# EAGLE board SparkFun_ESP32_Environment_Sensor_Shield_Panel_v10 (EAGLE 7.5.0), part 1 of 4
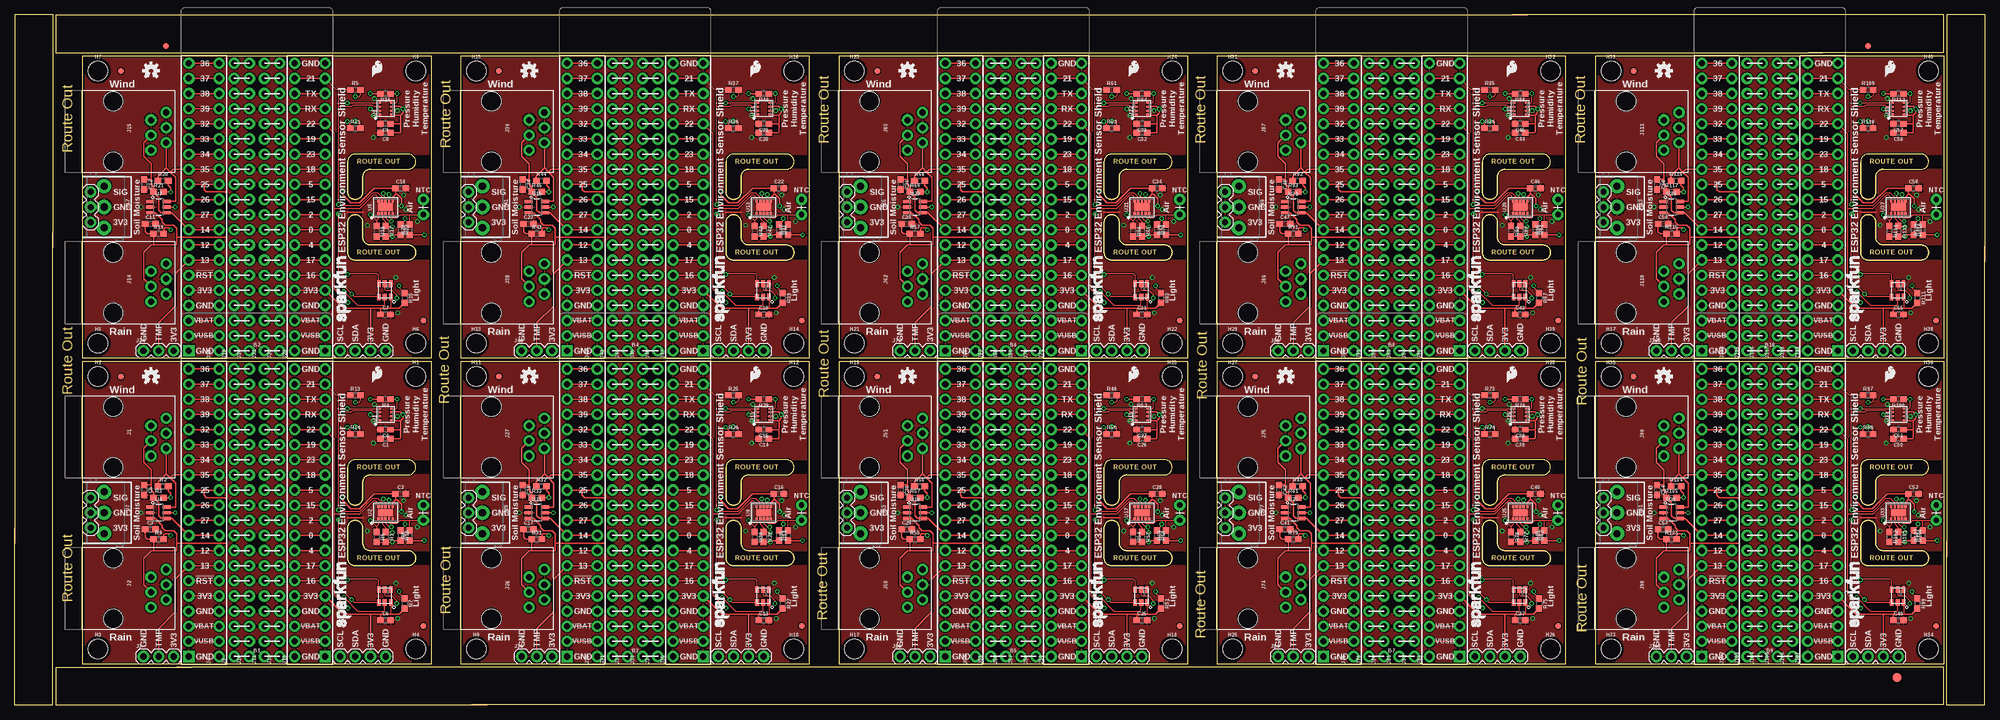
[diagram p0: board, top side]
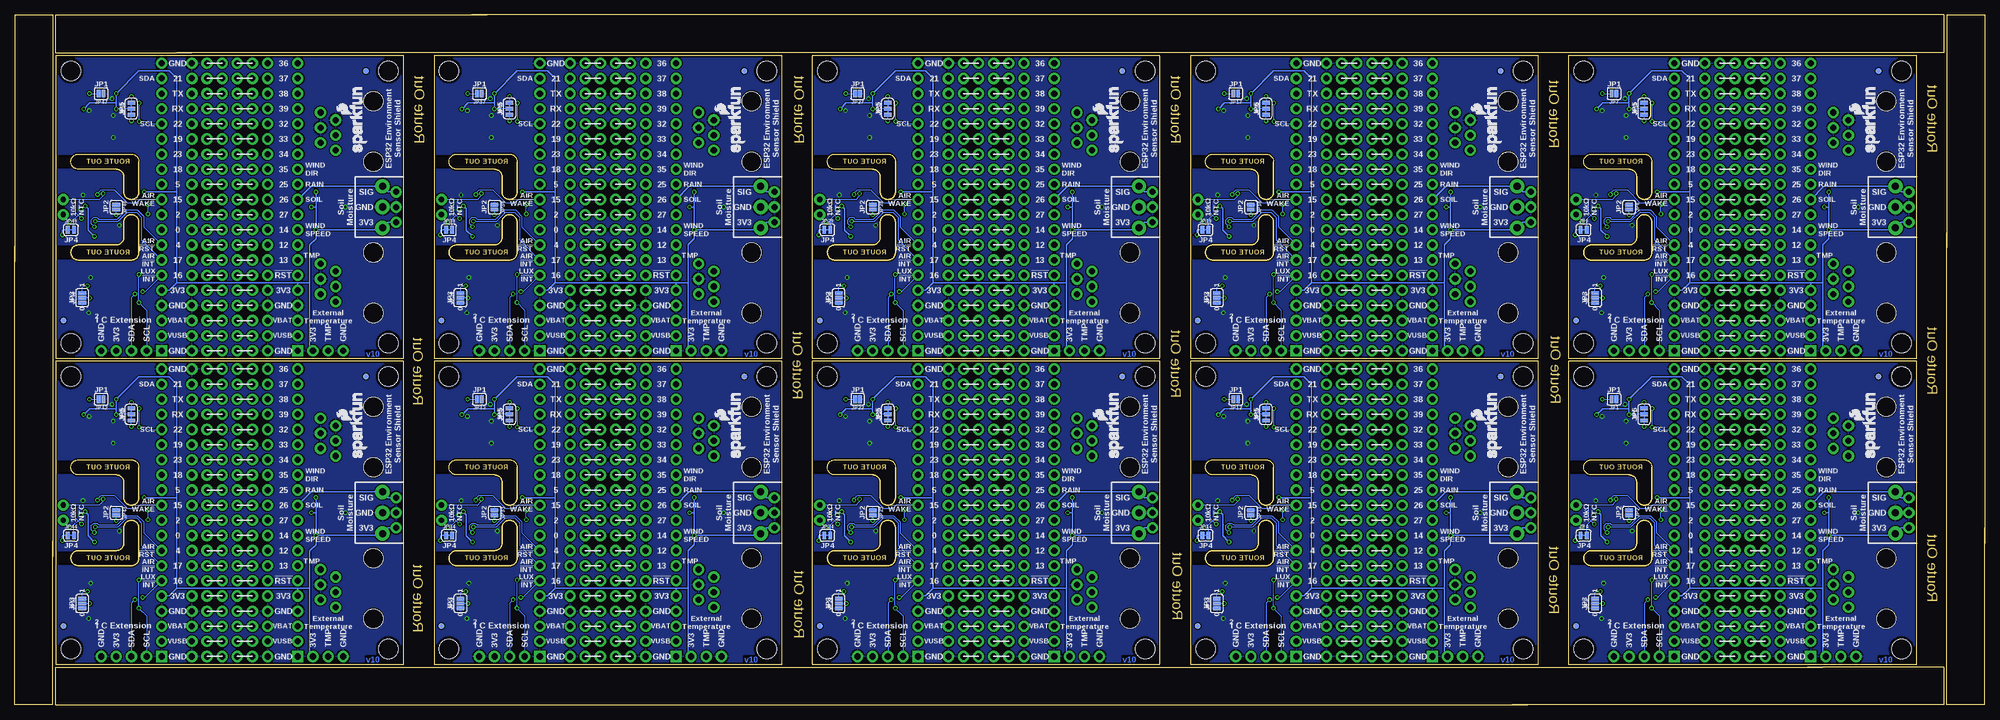
[diagram p1: board, bottom side, seen from below]

Size 330.71 x 115.82 mm. Coordinates in mm from the lower left corner, seen from the top.
Outline: 6.35,79.25 6.35,0 0,0 0,29.72
Outline: 0,27.18 0,115.82 6.35,115.82 6.35,76.71
Outline: 79.25,0 6.86,0 6.86,6.35 29.72,6.35
Outline: 27.18,6.35 323.85,6.35 323.85,0 76.71,0
Outline: 330.71,76.96 330.71,0 324.36,0 324.36,27.43
Outline: 324.36,24.89 324.36,115.82 330.71,115.82 330.71,74.42
Outline: 251.46,115.82 323.85,115.82 323.85,109.47 300.99,109.47
Outline: 303.53,109.47 6.86,109.47 6.86,115.82 254,115.82
Outline: 11.43,6.86 11.43,57.66 69.85,57.66 69.85,6.86 11.43,6.86
Outline: 57.15,41.15 arc90 55.88,39.88 55.88,34.8 arc90 57.15,33.53 arc90 58.42,34.8 58.42,37.34 arc-90 59.69,38.61 66.04,38.61 arc90 67.31,39.88 arc90 66.04,41.15 57.15,41.15
Outline: 55.88,24.64 arc90 57.15,23.37 66.04,23.37 arc90 67.31,24.64 arc90 66.04,25.91 59.69,25.91 arc-90 58.42,27.18 58.42,29.72 arc90 57.15,30.99 arc90 55.88,29.72 55.88,24.64
Outline: 11.43,58.17 11.43,108.97 69.85,108.97 69.85,58.17 11.43,58.17
Outline: 57.15,92.46 arc90 55.88,91.19 55.88,86.11 arc90 57.15,84.84 arc90 58.42,86.11 58.42,88.65 arc-90 59.69,89.92 66.04,89.92 arc90 67.31,91.19 arc90 66.04,92.46 57.15,92.46
Outline: 55.88,75.95 arc90 57.15,74.68 66.04,74.68 arc90 67.31,75.95 arc90 66.04,77.22 59.69,77.22 arc-90 58.42,78.49 58.42,81.03 arc90 57.15,82.3 arc90 55.88,81.03 55.88,75.95
Outline: 74.93,6.86 74.93,57.66 133.35,57.66 133.35,6.86 74.93,6.86
Outline: 120.65,41.15 arc90 119.38,39.88 119.38,34.8 arc90 120.65,33.53 arc90 121.92,34.8 121.92,37.34 arc-90 123.19,38.61 129.54,38.61 arc90 130.81,39.88 arc90 129.54,41.15 120.65,41.15
Outline: 119.38,24.64 arc90 120.65,23.37 129.54,23.37 arc90 130.81,24.64 arc90 129.54,25.91 123.19,25.91 arc-90 121.92,27.18 121.92,29.72 arc90 120.65,30.99 arc90 119.38,29.72 119.38,24.64
Outline: 74.93,58.17 74.93,108.97 133.35,108.97 133.35,58.17 74.93,58.17
Outline: 120.65,92.46 arc90 119.38,91.19 119.38,86.11 arc90 120.65,84.84 arc90 121.92,86.11 121.92,88.65 arc-90 123.19,89.92 129.54,89.92 arc90 130.81,91.19 arc90 129.54,92.46 120.65,92.46
Outline: 119.38,75.95 arc90 120.65,74.68 129.54,74.68 arc90 130.81,75.95 arc90 129.54,77.22 123.19,77.22 arc-90 121.92,78.49 121.92,81.03 arc90 120.65,82.3 arc90 119.38,81.03 119.38,75.95
Outline: 138.43,6.86 138.43,57.66 196.85,57.66 196.85,6.86 138.43,6.86
Outline: 184.15,41.15 arc90 182.88,39.88 182.88,34.8 arc90 184.15,33.53 arc90 185.42,34.8 185.42,37.34 arc-90 186.69,38.61 193.04,38.61 arc90 194.31,39.88 arc90 193.04,41.15 184.15,41.15
Outline: 182.88,24.64 arc90 184.15,23.37 193.04,23.37 arc90 194.31,24.64 arc90 193.04,25.91 186.69,25.91 arc-90 185.42,27.18 185.42,29.72 arc90 184.15,30.99 arc90 182.88,29.72 182.88,24.64
Outline: 138.43,58.17 138.43,108.97 196.85,108.97 196.85,58.17 138.43,58.17
Outline: 184.15,92.46 arc90 182.88,91.19 182.88,86.11 arc90 184.15,84.84 arc90 185.42,86.11 185.42,88.65 arc-90 186.69,89.92 193.04,89.92 arc90 194.31,91.19 arc90 193.04,92.46 184.15,92.46
Outline: 182.88,75.95 arc90 184.15,74.68 193.04,74.68 arc90 194.31,75.95 arc90 193.04,77.22 186.69,77.22 arc-90 185.42,78.49 185.42,81.03 arc90 184.15,82.3 arc90 182.88,81.03 182.88,75.95
Outline: 201.93,6.86 201.93,57.66 260.35,57.66 260.35,6.86 201.93,6.86
Outline: 247.65,41.15 arc90 246.38,39.88 246.38,34.8 arc90 247.65,33.53 arc90 248.92,34.8 248.92,37.34 arc-90 250.19,38.61 256.54,38.61 arc90 257.81,39.88 arc90 256.54,41.15 247.65,41.15
Outline: 246.38,24.64 arc90 247.65,23.37 256.54,23.37 arc90 257.81,24.64 arc90 256.54,25.91 250.19,25.91 arc-90 248.92,27.18 248.92,29.72 arc90 247.65,30.99 arc90 246.38,29.72 246.38,24.64
Outline: 201.93,58.17 201.93,108.97 260.35,108.97 260.35,58.17 201.93,58.17
Outline: 247.65,92.46 arc90 246.38,91.19 246.38,86.11 arc90 247.65,84.84 arc90 248.92,86.11 248.92,88.65 arc-90 250.19,89.92 256.54,89.92 arc90 257.81,91.19 arc90 256.54,92.46 247.65,92.46
Outline: 246.38,75.95 arc90 247.65,74.68 256.54,74.68 arc90 257.81,75.95 arc90 256.54,77.22 250.19,77.22 arc-90 248.92,78.49 248.92,81.03 arc90 247.65,82.3 arc90 246.38,81.03 246.38,75.95
Outline: 265.43,6.86 265.43,57.66 323.85,57.66 323.85,6.86 265.43,6.86
Outline: 311.15,41.15 arc90 309.88,39.88 309.88,34.8 arc90 311.15,33.53 arc90 312.42,34.8 312.42,37.34 arc-90 313.69,38.61 320.04,38.61 arc90 321.31,39.88 arc90 320.04,41.15 311.15,41.15
Outline: 309.88,24.64 arc90 311.15,23.37 320.04,23.37 arc90 321.31,24.64 arc90 320.04,25.91 313.69,25.91 arc-90 312.42,27.18 312.42,29.72 arc90 311.15,30.99 arc90 309.88,29.72 309.88,24.64
Outline: 265.43,58.17 265.43,108.97 323.85,108.97 323.85,58.17 265.43,58.17
Outline: 311.15,92.46 arc90 309.88,91.19 309.88,86.11 arc90 311.15,84.84 arc90 312.42,86.11 312.42,88.65 arc-90 313.69,89.92 320.04,89.92 arc90 321.31,91.19 arc90 320.04,92.46 311.15,92.46
Outline: 309.88,75.95 arc90 311.15,74.68 320.04,74.68 arc90 321.31,75.95 arc90 320.04,77.22 313.69,77.22 arc-90 312.42,78.49 312.42,81.03 arc90 311.15,82.3 arc90 309.88,81.03 309.88,75.95
Copper layers (1*16): Top 0.035mm / dielectric 1.5mm / Bottom 0.035mm
Design rules "SparkFun-2-layer-TIGHT": minimum track width 7mil, minimum drill 15mil, track to track 7mil, track to pad 7mil, pad to pad 7mil, via to via 7mil, smd to smd 7mil, copper to edge 7mil, drill to drill 7mil, minimum pad ring 7mil, minimum via ring 7mil, stop-mask expansion 4mil, vias tented up to drill 25mil, thermal gap 10mil
Milling: area 55.9,33.5 to 67.3,41.1; area 55.9,23.4 to 67.3,31; area 55.9,84.8 to 67.3,92.5; area 55.9,74.7 to 67.3,82.3; area 119.4,33.5 to 130.8,41.1; area 119.4,23.4 to 130.8,31; area 119.4,84.8 to 130.8,92.5; area 119.4,74.7 to 130.8,82.3; area 182.9,33.5 to 194.3,41.1; area 182.9,23.4 to 194.3,31; area 182.9,84.8 to 194.3,92.5; area 182.9,74.7 to 194.3,82.3; area 246.4,33.5 to 257.8,41.1; area 246.4,23.4 to 257.8,31; area 246.4,84.8 to 257.8,92.5; area 246.4,74.7 to 257.8,82.3; area 309.9,33.5 to 321.3,41.1; area 309.9,23.4 to 321.3,31; area 309.9,84.8 to 321.3,92.5; area 309.9,74.7 to 321.3,82.3

## Footprints (pad centres in the part's own frame; a part is rotated, then mirrored left to right if it is on the bottom)
ESP32_THING_NO_ANT = drill 1.016 pad 1.88 square: 1 1.27,1.27; 40 24.13,1.27 | drill 1.016 pad 1.88: 2 1.27,3.81; 3 1.27,6.35; 4 1.27,8.89; 5 1.27,11.43; 6 1.27,13.97; 7 1.27,16.51; 8 1.27,19.05; 9 1.27,21.59; 10 1.27,24.13; 11 1.27,26.67; 12 1.27,29.21; 13 1.27,31.75; 14 1.27,34.29; 15 1.27,36.83; 16 1.27,39.37; 17 1.27,41.91; 18 1.27,44.45; 19 1.27,46.99; 20 1.27,49.53; 21 24.13,49.53; 22 24.13,46.99; 23 24.13,44.45; 24 24.13,41.91; 25 24.13,39.37; 26 24.13,36.83; 27 24.13,34.29; 28 24.13,31.75; 29 24.13,29.21; 30 24.13,26.67; 31 24.13,24.13; 32 24.13,21.59; 33 24.13,19.05; 34 24.13,16.51; 35 24.13,13.97; 36 24.13,11.43; 37 24.13,8.89; 38 24.13,6.35; 39 24.13,3.81
0603 = smd 1.1 x 1: 1 -0.85,0; 2 0.85,0
FIDUCIAL-1.5X3 = smd 1.5 x 1.5: 1 0,0
FIDUCIAL-1X2 = smd 1 x 1: 1 0,0
STAND-OFF = hole 3.302: 0,0
RJ11-6 = drill 1.016 pad 1.88: 1 -3.175,8.89; 2 -1.905,6.35; 3 -0.635,8.89; 4 0.635,6.35; 5 1.905,8.89; 6 3.175,6.35 | hole 3.251: -5.08,0; 5.08,0
1X03 = drill 1.016 pad 1.88: 1 0,0; 2 2.54,0; 3 5.08,0
1X20_NOSILK = drill 1.016 pad 1.88: 1 0,0; 2 2.54,0; 3 5.08,0; 4 7.62,0; 5 10.16,0; 6 12.7,0; 7 15.24,0; 8 17.78,0; 9 20.32,0; 10 22.86,0; 11 25.4,0; 12 27.94,0; 13 30.48,0; 14 33.02,0; 15 35.56,0; 16 38.1,0; 17 40.64,0; 18 43.18,0; 19 45.72,0; 20 48.26,0
1X04 = drill 1.016 pad 1.88: 1 0,0; 2 2.54,0; 3 5.08,0; 4 7.62,0
SCREWTERMINAL-3.5MM-3-NS = drill 1.2 pad 2.413: 1 0,0; 2 3.5,0; 3 7,0
SMT-JUMPER_2_NO_SILK = smd 0.635 x 1.27: 1 -0.406,0; 2 0.406,0
SMT-JUMPER_3_NO_SILK = smd 0.635 x 1.27: 1 -0.813,0; 2 0,0; 3 0.813,0
SMT-JUMPER_2_NC_TRACE_SILK = smd 0.635 x 1.27: 1 -0.508,0; 2 0.508,0
SMT-JUMPER_3_2-NC_TRACE_SILK = smd 0.635 x 1.27: 1 -1.016,0; 2 0,0; 3 1.016,0
AXIAL-0.1 = drill 0.9 pad 1.88: P$1 -1.27,0; P$2 1.27,0
LGA-8-2.5X2.5 = smd 0.35 x 0.5: 1 -0.975,1.025; 2 -0.325,1.025; 3 0.325,1.025; 4 0.975,1.025; 5 0.975,-1.025; 6 0.325,-1.025; 7 -0.325,-1.025; 8 -0.975,-1.025
LGA10-2.7X4.0MM = smd 0.7 x 0.4: 1 -1.1,1.2; 2 -1.1,0.6; 3 -1.1,0; 4 -1.1,-0.6; 5 -1.1,-1.2; 6 1.1,-1.2; 7 1.1,-0.6; 8 1.1,0; 9 1.1,0.6; 10 1.1,1.2 | smd 1.25 x 2.45: EP 0,0
CHIPLED-6 = smd 1.1 x 0.6: P1 1.1,1; P2 -1.1,1; P4 -1.1,-1; P5 1.1,-1 | smd 1.1 x 0.7: P3 -1.1,0; P6 1.1,0
SOT-23-6 = smd 0.55 x 1.35: 1 -0.95,-1.375; 2 0,-1.375; 3 0.95,-1.375; 4 0.95,1.375; 5 0,1.375; 6 -0.95,1.375

## Placement (x,y rotation side)
B1  ESP32_THING_WO_ANT_KEEPOUT  [ESP32_THING_NO_ANT]  27.94,6.86 0 top
B2  ESP32_THING_WO_ANT_KEEPOUT  [ESP32_THING_NO_ANT]  27.94,58.17 0 top
B3  ESP32_THING_WO_ANT_KEEPOUT  [ESP32_THING_NO_ANT]  91.44,6.86 0 top
B4  ESP32_THING_WO_ANT_KEEPOUT  [ESP32_THING_NO_ANT]  91.44,58.17 0 top
B5  ESP32_THING_WO_ANT_KEEPOUT  [ESP32_THING_NO_ANT]  154.94,6.86 0 top
B6  ESP32_THING_WO_ANT_KEEPOUT  [ESP32_THING_NO_ANT]  154.94,58.17 0 top
B7  ESP32_THING_WO_ANT_KEEPOUT  [ESP32_THING_NO_ANT]  218.44,6.86 0 top
B8  ESP32_THING_WO_ANT_KEEPOUT  [ESP32_THING_NO_ANT]  218.44,58.17 0 top
B9  ESP32_THING_WO_ANT_KEEPOUT  [ESP32_THING_NO_ANT]  281.94,6.86 0 top
B10  ESP32_THING_WO_ANT_KEEPOUT  [ESP32_THING_NO_ANT]  281.94,58.17 0 top
C1  0.1uF  [0603]  62.23,44.7 180 top
C2  1.0uF  [0603]  64.77,35.43 0 top
C3  1.0uF  [0603]  22.73,29.46 0 top
C4  0.1uF  [0603]  62.23,46.23 180 top
C5  1.0uF  [0603]  21.72,36.07 270 top
C6  0.1uF  [0603]  62.23,14.22 0 top
C7  0.1uF  [0603]  62.23,65.53 0 top
C8  0.1uF  [0603]  62.23,96.01 180 top
C9  0.1uF  [0603]  62.23,97.54 180 top
C10  1.0uF  [0603]  64.77,86.74 0 top
C11  1.0uF  [0603]  22.73,80.77 0 top
C12  1.0uF  [0603]  21.72,87.38 270 top
C13  0.1uF  [0603]  125.73,14.22 0 top
C14  0.1uF  [0603]  125.73,44.7 180 top
C15  0.1uF  [0603]  125.73,46.23 180 top
C16  1.0uF  [0603]  128.27,35.43 0 top
C17  1.0uF  [0603]  86.23,29.46 0 top
C18  1.0uF  [0603]  85.22,36.07 270 top
C19  0.1uF  [0603]  125.73,65.53 0 top
C20  0.1uF  [0603]  125.73,96.01 180 top
C21  0.1uF  [0603]  125.73,97.54 180 top
C22  1.0uF  [0603]  128.27,86.74 0 top
C23  1.0uF  [0603]  86.23,80.77 0 top
C24  1.0uF  [0603]  85.22,87.38 270 top
C25  0.1uF  [0603]  189.23,14.22 0 top
C26  0.1uF  [0603]  189.23,44.7 180 top
C27  0.1uF  [0603]  189.23,46.23 180 top
C28  1.0uF  [0603]  191.77,35.43 0 top
C29  1.0uF  [0603]  149.73,29.46 0 top
C30  1.0uF  [0603]  148.72,36.07 270 top
C31  0.1uF  [0603]  189.23,65.53 0 top
C32  0.1uF  [0603]  189.23,96.01 180 top
C33  0.1uF  [0603]  189.23,97.54 180 top
C34  1.0uF  [0603]  191.77,86.74 0 top
C35  1.0uF  [0603]  149.73,80.77 0 top
C36  1.0uF  [0603]  148.72,87.38 270 top
C37  0.1uF  [0603]  252.73,14.22 0 top
C38  0.1uF  [0603]  252.73,44.7 180 top
C39  0.1uF  [0603]  252.73,46.23 180 top
C40  1.0uF  [0603]  255.27,35.43 0 top
C41  1.0uF  [0603]  213.23,29.46 0 top
C42  1.0uF  [0603]  212.22,36.07 270 top
C43  0.1uF  [0603]  252.73,65.53 0 top
C44  0.1uF  [0603]  252.73,96.01 180 top
C45  0.1uF  [0603]  252.73,97.54 180 top
C46  1.0uF  [0603]  255.27,86.74 0 top
C47  1.0uF  [0603]  213.23,80.77 0 top
C48  1.0uF  [0603]  212.22,87.38 270 top
C49  0.1uF  [0603]  316.23,14.22 0 top
C50  0.1uF  [0603]  316.23,44.7 180 top
C51  0.1uF  [0603]  316.23,46.23 180 top
C52  1.0uF  [0603]  318.77,35.43 0 top
C53  1.0uF  [0603]  276.73,29.46 0 top
C54  1.0uF  [0603]  275.72,36.07 270 top
C55  0.1uF  [0603]  316.23,65.53 0 top
C56  0.1uF  [0603]  316.23,96.01 180 top
C57  0.1uF  [0603]  316.23,97.54 180 top
C58  1.0uF  [0603]  318.77,86.74 0 top
C59  1.0uF  [0603]  276.73,80.77 0 top
C60  1.0uF  [0603]  275.72,87.38 270 top
E$1  [FIDUCIAL-1.5X3]  315.98,4.57 0 top
E$7  [FIDUCIAL-1X2]  311.15,110.62 90 top
E$8  [FIDUCIAL-1X2]  25.4,110.62 270 top
FD1  FIDUCIAL1X2  [FIDUCIAL-1X2]  17.78,55.12 0 top
FD2  FIDUCIAL1X2  [FIDUCIAL-1X2]  68.58,13.21 0 top
FD3  FIDUCIAL1X2  [FIDUCIAL-1X2]  68.58,13.21 0 bottom
FD4  FIDUCIAL1X2  [FIDUCIAL-1X2]  17.78,55.12 0 bottom
FD5  FIDUCIAL1X2  [FIDUCIAL-1X2]  17.78,106.43 0 top
FD6  FIDUCIAL1X2  [FIDUCIAL-1X2]  68.58,64.52 0 top
FD7  FIDUCIAL1X2  [FIDUCIAL-1X2]  68.58,64.52 0 bottom
FD8  FIDUCIAL1X2  [FIDUCIAL-1X2]  17.78,106.43 0 bottom
FD9  FIDUCIAL1X2  [FIDUCIAL-1X2]  81.28,55.12 0 top
FD10  FIDUCIAL1X2  [FIDUCIAL-1X2]  132.08,13.21 0 top
FD11  FIDUCIAL1X2  [FIDUCIAL-1X2]  132.08,13.21 0 bottom
FD12  FIDUCIAL1X2  [FIDUCIAL-1X2]  81.28,55.12 0 bottom
FD13  FIDUCIAL1X2  [FIDUCIAL-1X2]  81.28,106.43 0 top
FD14  FIDUCIAL1X2  [FIDUCIAL-1X2]  132.08,64.52 0 top
FD15  FIDUCIAL1X2  [FIDUCIAL-1X2]  132.08,64.52 0 bottom
FD16  FIDUCIAL1X2  [FIDUCIAL-1X2]  81.28,106.43 0 bottom
FD17  FIDUCIAL1X2  [FIDUCIAL-1X2]  144.78,55.12 0 top
FD18  FIDUCIAL1X2  [FIDUCIAL-1X2]  195.58,13.21 0 top
FD19  FIDUCIAL1X2  [FIDUCIAL-1X2]  195.58,13.21 0 bottom
FD20  FIDUCIAL1X2  [FIDUCIAL-1X2]  144.78,55.12 0 bottom
FD21  FIDUCIAL1X2  [FIDUCIAL-1X2]  144.78,106.43 0 top
FD22  FIDUCIAL1X2  [FIDUCIAL-1X2]  195.58,64.52 0 top
FD23  FIDUCIAL1X2  [FIDUCIAL-1X2]  195.58,64.52 0 bottom
FD24  FIDUCIAL1X2  [FIDUCIAL-1X2]  144.78,106.43 0 bottom
FD25  FIDUCIAL1X2  [FIDUCIAL-1X2]  208.28,55.12 0 top
FD26  FIDUCIAL1X2  [FIDUCIAL-1X2]  259.08,13.21 0 top
FD27  FIDUCIAL1X2  [FIDUCIAL-1X2]  259.08,13.21 0 bottom
FD28  FIDUCIAL1X2  [FIDUCIAL-1X2]  208.28,55.12 0 bottom
FD29  FIDUCIAL1X2  [FIDUCIAL-1X2]  208.28,106.43 0 top
FD30  FIDUCIAL1X2  [FIDUCIAL-1X2]  259.08,64.52 0 top
FD31  FIDUCIAL1X2  [FIDUCIAL-1X2]  259.08,64.52 0 bottom
FD32  FIDUCIAL1X2  [FIDUCIAL-1X2]  208.28,106.43 0 bottom
FD33  FIDUCIAL1X2  [FIDUCIAL-1X2]  271.78,55.12 0 top
FD34  FIDUCIAL1X2  [FIDUCIAL-1X2]  322.58,13.21 0 top
FD35  FIDUCIAL1X2  [FIDUCIAL-1X2]  322.58,13.21 0 bottom
FD36  FIDUCIAL1X2  [FIDUCIAL-1X2]  271.78,55.12 0 bottom
FD37  FIDUCIAL1X2  [FIDUCIAL-1X2]  271.78,106.43 0 top
FD38  FIDUCIAL1X2  [FIDUCIAL-1X2]  322.58,64.52 0 top
FD39  FIDUCIAL1X2  [FIDUCIAL-1X2]  322.58,64.52 0 bottom
FD40  FIDUCIAL1X2  [FIDUCIAL-1X2]  271.78,106.43 0 bottom
H1  STAND-OFF  [STAND-OFF]  67.31,55.12 0 top
H2  STAND-OFF  [STAND-OFF]  13.97,55.12 0 top
H3  STAND-OFF  [STAND-OFF]  13.97,9.4 0 top
H4  STAND-OFF  [STAND-OFF]  67.31,9.4 0 top
H5  STAND-OFF  [STAND-OFF]  13.97,60.71 0 top
H6  STAND-OFF  [STAND-OFF]  67.31,60.71 0 top
H7  STAND-OFF  [STAND-OFF]  13.97,106.43 0 top
H8  STAND-OFF  [STAND-OFF]  67.31,106.43 0 top
H9  STAND-OFF  [STAND-OFF]  77.47,9.4 0 top
H10  STAND-OFF  [STAND-OFF]  130.81,9.4 0 top
H11  STAND-OFF  [STAND-OFF]  77.47,55.12 0 top
H12  STAND-OFF  [STAND-OFF]  130.81,55.12 0 top
H13  STAND-OFF  [STAND-OFF]  77.47,60.71 0 top
H14  STAND-OFF  [STAND-OFF]  130.81,60.71 0 top
H15  STAND-OFF  [STAND-OFF]  77.47,106.43 0 top
H16  STAND-OFF  [STAND-OFF]  130.81,106.43 0 top
H17  STAND-OFF  [STAND-OFF]  140.97,9.4 0 top
H18  STAND-OFF  [STAND-OFF]  194.31,9.4 0 top
H19  STAND-OFF  [STAND-OFF]  140.97,55.12 0 top
H20  STAND-OFF  [STAND-OFF]  194.31,55.12 0 top
H21  STAND-OFF  [STAND-OFF]  140.97,60.71 0 top
H22  STAND-OFF  [STAND-OFF]  194.31,60.71 0 top
H23  STAND-OFF  [STAND-OFF]  140.97,106.43 0 top
H24  STAND-OFF  [STAND-OFF]  194.31,106.43 0 top
H25  STAND-OFF  [STAND-OFF]  204.47,9.4 0 top
H26  STAND-OFF  [STAND-OFF]  257.81,9.4 0 top
H27  STAND-OFF  [STAND-OFF]  204.47,55.12 0 top
H28  STAND-OFF  [STAND-OFF]  257.81,55.12 0 top
H29  STAND-OFF  [STAND-OFF]  204.47,60.71 0 top
H30  STAND-OFF  [STAND-OFF]  257.81,60.71 0 top
H31  STAND-OFF  [STAND-OFF]  204.47,106.43 0 top
H32  STAND-OFF  [STAND-OFF]  257.81,106.43 0 top
H33  STAND-OFF  [STAND-OFF]  267.97,9.4 0 top
H34  STAND-OFF  [STAND-OFF]  321.31,9.4 0 top
H35  STAND-OFF  [STAND-OFF]  267.97,55.12 0 top
H36  STAND-OFF  [STAND-OFF]  321.31,55.12 0 top
H37  STAND-OFF  [STAND-OFF]  267.97,60.71 0 top
H38  STAND-OFF  [STAND-OFF]  321.31,60.71 0 top
H39  STAND-OFF  [STAND-OFF]  267.97,106.43 0 top
H40  STAND-OFF  [STAND-OFF]  321.31,106.43 0 top
J1  WEATHER_METER-WIND  [RJ11-6]  16.51,44.96 270 top
J2  WEATHER_METER-RAIN  [RJ11-6]  16.51,19.56 270 top
J3  [1X03]  21.59,8.13 0 top
J4  [1X20_NOSILK]  34.29,8.13 90 top
J5  [1X03]  12.7,29.72 90 top
J6  [1X04]  62.23,59.44 180 top
J7  [SCREWTERMINAL-3.5MM-3-NS]  14.99,35.76 270 top
J8  [1X04]  62.23,8.13 180 top
J9  [1X20_NOSILK]  36.83,8.13 90 top
J10  [1X20_NOSILK]  39.37,8.13 90 top
J11  [1X20_NOSILK]  41.91,8.13 90 top
J12  [1X20_NOSILK]  44.45,8.13 90 top
J13  [1X20_NOSILK]  46.99,8.13 90 top
J14  WEATHER_METER-RAIN  [RJ11-6]  16.51,70.87 270 top
J15  WEATHER_METER-WIND  [RJ11-6]  16.51,96.27 270 top
J16  [1X03]  12.7,81.03 90 top
J17  [SCREWTERMINAL-3.5MM-3-NS]  14.99,87.07 270 top
J18  [1X20_NOSILK]  34.29,59.44 90 top
J19  [1X20_NOSILK]  36.83,59.44 90 top
J20  [1X20_NOSILK]  39.37,59.44 90 top
J21  [1X20_NOSILK]  41.91,59.44 90 top
J22  [1X20_NOSILK]  44.45,59.44 90 top
J23  [1X20_NOSILK]  46.99,59.44 90 top
J24  [1X03]  21.59,59.44 0 top
J25  [1X04]  125.73,8.13 180 top
J26  WEATHER_METER-RAIN  [RJ11-6]  80.01,19.56 270 top
J27  WEATHER_METER-WIND  [RJ11-6]  80.01,44.96 270 top
J28  [1X03]  76.2,29.72 90 top
J29  [SCREWTERMINAL-3.5MM-3-NS]  78.49,35.76 270 top
J30  [1X20_NOSILK]  97.79,8.13 90 top
J31  [1X20_NOSILK]  100.33,8.13 90 top
J32  [1X20_NOSILK]  102.87,8.13 90 top
J33  [1X20_NOSILK]  105.41,8.13 90 top
J34  [1X20_NOSILK]  107.95,8.13 90 top
J35  [1X20_NOSILK]  110.49,8.13 90 top
J36  [1X03]  85.09,8.13 0 top
J37  [1X04]  125.73,59.44 180 top
J38  WEATHER_METER-RAIN  [RJ11-6]  80.01,70.87 270 top
J39  WEATHER_METER-WIND  [RJ11-6]  80.01,96.27 270 top
J40  [1X03]  76.2,81.03 90 top
J41  [SCREWTERMINAL-3.5MM-3-NS]  78.49,87.07 270 top
J42  [1X20_NOSILK]  97.79,59.44 90 top
J43  [1X20_NOSILK]  100.33,59.44 90 top
J44  [1X20_NOSILK]  102.87,59.44 90 top
J45  [1X20_NOSILK]  105.41,59.44 90 top
J46  [1X20_NOSILK]  107.95,59.44 90 top
J47  [1X20_NOSILK]  110.49,59.44 90 top
J48  [1X03]  85.09,59.44 0 top
J49  [1X04]  189.23,8.13 180 top
J50  WEATHER_METER-RAIN  [RJ11-6]  143.51,19.56 270 top
J51  WEATHER_METER-WIND  [RJ11-6]  143.51,44.96 270 top
J52  [1X03]  139.7,29.72 90 top
J53  [SCREWTERMINAL-3.5MM-3-NS]  141.99,35.76 270 top
J54  [1X20_NOSILK]  161.29,8.13 90 top
J55  [1X20_NOSILK]  163.83,8.13 90 top
J56  [1X20_NOSILK]  166.37,8.13 90 top
J57  [1X20_NOSILK]  168.91,8.13 90 top
J58  [1X20_NOSILK]  171.45,8.13 90 top
J59  [1X20_NOSILK]  173.99,8.13 90 top
J60  [1X03]  148.59,8.13 0 top
J61  [1X04]  189.23,59.44 180 top
J62  WEATHER_METER-RAIN  [RJ11-6]  143.51,70.87 270 top
J63  WEATHER_METER-WIND  [RJ11-6]  143.51,96.27 270 top
J64  [1X03]  139.7,81.03 90 top
J65  [SCREWTERMINAL-3.5MM-3-NS]  141.99,87.07 270 top
J66  [1X20_NOSILK]  161.29,59.44 90 top
J67  [1X20_NOSILK]  163.83,59.44 90 top
J68  [1X20_NOSILK]  166.37,59.44 90 top
J69  [1X20_NOSILK]  168.91,59.44 90 top
J70  [1X20_NOSILK]  171.45,59.44 90 top
J71  [1X20_NOSILK]  173.99,59.44 90 top
J72  [1X03]  148.59,59.44 0 top
J73  [1X04]  252.73,8.13 180 top
J74  WEATHER_METER-RAIN  [RJ11-6]  207.01,19.56 270 top
J75  WEATHER_METER-WIND  [RJ11-6]  207.01,44.96 270 top
J76  [1X03]  203.2,29.72 90 top
J77  [SCREWTERMINAL-3.5MM-3-NS]  205.49,35.76 270 top
J78  [1X20_NOSILK]  224.79,8.13 90 top
J79  [1X20_NOSILK]  227.33,8.13 90 top
J80  [1X20_NOSILK]  229.87,8.13 90 top
J81  [1X20_NOSILK]  232.41,8.13 90 top
J82  [1X20_NOSILK]  234.95,8.13 90 top
J83  [1X20_NOSILK]  237.49,8.13 90 top
J84  [1X03]  212.09,8.13 0 top
J85  [1X04]  252.73,59.44 180 top
J86  WEATHER_METER-RAIN  [RJ11-6]  207.01,70.87 270 top
J87  WEATHER_METER-WIND  [RJ11-6]  207.01,96.27 270 top
J88  [1X03]  203.2,81.03 90 top
J89  [SCREWTERMINAL-3.5MM-3-NS]  205.49,87.07 270 top
J90  [1X20_NOSILK]  224.79,59.44 90 top
J91  [1X20_NOSILK]  227.33,59.44 90 top
J92  [1X20_NOSILK]  229.87,59.44 90 top
J93  [1X20_NOSILK]  232.41,59.44 90 top
J94  [1X20_NOSILK]  234.95,59.44 90 top
J95  [1X20_NOSILK]  237.49,59.44 90 top
J96  [1X03]  212.09,59.44 0 top
J97  [1X04]  316.23,8.13 180 top
J98  WEATHER_METER-RAIN  [RJ11-6]  270.51,19.56 270 top
J99  WEATHER_METER-WIND  [RJ11-6]  270.51,44.96 270 top
J100  [1X03]  266.7,29.72 90 top
J101  [SCREWTERMINAL-3.5MM-3-NS]  268.99,35.76 270 top
J102  [1X20_NOSILK]  288.29,8.13 90 top
J103  [1X20_NOSILK]  290.83,8.13 90 top
J104  [1X20_NOSILK]  293.37,8.13 90 top
J105  [1X20_NOSILK]  295.91,8.13 90 top
J106  [1X20_NOSILK]  298.45,8.13 90 top
J107  [1X20_NOSILK]  300.99,8.13 90 top
J108  [1X03]  275.59,8.13 0 top
J109  [1X04]  316.23,59.44 180 top
J110  WEATHER_METER-RAIN  [RJ11-6]  270.51,70.87 270 top
J111  WEATHER_METER-WIND  [RJ11-6]  270.51,96.27 270 top
J112  [1X03]  266.7,81.03 90 top
J113  [SCREWTERMINAL-3.5MM-3-NS]  268.99,87.07 270 top
J114  [1X20_NOSILK]  288.29,59.44 90 top
J115  [1X20_NOSILK]  290.83,59.44 90 top
J116  [1X20_NOSILK]  293.37,59.44 90 top
J117  [1X20_NOSILK]  295.91,59.44 90 top
J118  [1X20_NOSILK]  298.45,59.44 90 top
J119  [1X20_NOSILK]  300.99,59.44 90 top
J120  [1X03]  275.59,59.44 0 top
JP1  [SMT-JUMPER_2_NO_SILK]  62.23,51.31 180 bottom
JP2  [SMT-JUMPER_2_NO_SILK]  59.69,32.26 270 bottom
JP3  [SMT-JUMPER_3_NO_SILK]  65.41,17.02 90 bottom
JP4  [SMT-JUMPER_2_NC_TRACE_SILK]  67.31,28.45 0 bottom
JP5  [SMT-JUMPER_3_2-NC_TRACE_SILK]  57.15,48.77 90 bottom
JP6  [SMT-JUMPER_3_NO_SILK]  65.41,68.33 90 bottom
JP7  [SMT-JUMPER_2_NO_SILK]  62.23,102.62 180 bottom
JP8  [SMT-JUMPER_2_NO_SILK]  59.69,83.57 270 bottom
JP9  [SMT-JUMPER_2_NC_TRACE_SILK]  67.31,79.76 0 bottom
JP10  [SMT-JUMPER_3_2-NC_TRACE_SILK]  57.15,100.08 90 bottom
JP11  [SMT-JUMPER_3_NO_SILK]  128.91,17.02 90 bottom
JP12  [SMT-JUMPER_2_NO_SILK]  125.73,51.31 180 bottom
JP13  [SMT-JUMPER_2_NO_SILK]  123.19,32.26 270 bottom
JP14  [SMT-JUMPER_2_NC_TRACE_SILK]  130.81,28.45 0 bottom
JP15  [SMT-JUMPER_3_2-NC_TRACE_SILK]  120.65,48.77 90 bottom
JP16  [SMT-JUMPER_3_NO_SILK]  128.91,68.33 90 bottom
JP17  [SMT-JUMPER_2_NO_SILK]  125.73,102.62 180 bottom
JP18  [SMT-JUMPER_2_NO_SILK]  123.19,83.57 270 bottom
JP19  [SMT-JUMPER_2_NC_TRACE_SILK]  130.81,79.76 0 bottom
JP20  [SMT-JUMPER_3_2-NC_TRACE_SILK]  120.65,100.08 90 bottom
JP21  [SMT-JUMPER_3_NO_SILK]  192.41,17.02 90 bottom
JP22  [SMT-JUMPER_2_NO_SILK]  189.23,51.31 180 bottom
JP23  [SMT-JUMPER_2_NO_SILK]  186.69,32.26 270 bottom
JP24  [SMT-JUMPER_2_NC_TRACE_SILK]  194.31,28.45 0 bottom
JP25  [SMT-JUMPER_3_2-NC_TRACE_SILK]  184.15,48.77 90 bottom
JP26  [SMT-JUMPER_3_NO_SILK]  192.41,68.33 90 bottom
JP27  [SMT-JUMPER_2_NO_SILK]  189.23,102.62 180 bottom
JP28  [SMT-JUMPER_2_NO_SILK]  186.69,83.57 270 bottom
JP29  [SMT-JUMPER_2_NC_TRACE_SILK]  194.31,79.76 0 bottom
JP30  [SMT-JUMPER_3_2-NC_TRACE_SILK]  184.15,100.08 90 bottom
JP31  [SMT-JUMPER_3_NO_SILK]  255.91,17.02 90 bottom
JP32  [SMT-JUMPER_2_NO_SILK]  252.73,51.31 180 bottom
JP33  [SMT-JUMPER_2_NO_SILK]  250.19,32.26 270 bottom
JP34  [SMT-JUMPER_2_NC_TRACE_SILK]  257.81,28.45 0 bottom
JP35  [SMT-JUMPER_3_2-NC_TRACE_SILK]  247.65,48.77 90 bottom
JP36  [SMT-JUMPER_3_NO_SILK]  255.91,68.33 90 bottom
JP37  [SMT-JUMPER_2_NO_SILK]  252.73,102.62 180 bottom
JP38  [SMT-JUMPER_2_NO_SILK]  250.19,83.57 270 bottom
JP39  [SMT-JUMPER_2_NC_TRACE_SILK]  257.81,79.76 0 bottom
JP40  [SMT-JUMPER_3_2-NC_TRACE_SILK]  247.65,100.08 90 bottom
JP41  [SMT-JUMPER_3_NO_SILK]  319.4,17.02 90 bottom
JP42  [SMT-JUMPER_2_NO_SILK]  316.23,51.31 180 bottom
JP43  [SMT-JUMPER_2_NO_SILK]  313.69,32.26 270 bottom
JP44  [SMT-JUMPER_2_NC_TRACE_SILK]  321.31,28.45 0 bottom
JP45  [SMT-JUMPER_3_2-NC_TRACE_SILK]  311.15,48.77 90 bottom
JP46  [SMT-JUMPER_3_NO_SILK]  319.4,68.33 90 bottom
JP47  [SMT-JUMPER_2_NO_SILK]  316.23,102.62 180 bottom
JP48  [SMT-JUMPER_2_NO_SILK]  313.69,83.57 270 bottom
JP49  [SMT-JUMPER_2_NC_TRACE_SILK]  321.31,79.76 0 bottom
JP50  [SMT-JUMPER_3_2-NC_TRACE_SILK]  311.15,100.08 90 bottom
LOGO1  SFE_LOGO_NAME.1_INCH  [SFE_LOGO_NAME_.1]  56.9,12.57 90 top
LOGO2  SFE_LOGO_NAME_FLAME.1_INCH  [SFE_LOGO_NAME_FLAME_.1]  17.53,41.02 90 bottom
LOGO3  SFE_LOGO_FLAME.1_INCH  [SFE_LOGO_FLAME_.1]  59.69,53.85 0 top
LOGO4  OSHW-LOGOS  [OSHW-LOGO-S]  22.86,55.12 0 top
LOGO5  SFE_LOGO_NAME.1_INCH  [SFE_LOGO_NAME_.1]  56.9,63.88 90 top
LOGO6  OSHW-LOGOS  [OSHW-LOGO-S]  22.86,106.43 0 top
LOGO7  SFE_LOGO_NAME_FLAME.1_INCH  [SFE_LOGO_NAME_FLAME_.1]  17.53,92.33 90 bottom
LOGO8  SFE_LOGO_FLAME.1_INCH  [SFE_LOGO_FLAME_.1]  59.69,105.16 0 top
LOGO9  SFE_LOGO_NAME.1_INCH  [SFE_LOGO_NAME_.1]  120.4,12.57 90 top
LOGO10  OSHW-LOGOS  [OSHW-LOGO-S]  86.36,55.12 0 top
LOGO11  SFE_LOGO_NAME_FLAME.1_INCH  [SFE_LOGO_NAME_FLAME_.1]  81.03,41.02 90 bottom
LOGO12  SFE_LOGO_FLAME.1_INCH  [SFE_LOGO_FLAME_.1]  123.19,53.85 0 top
LOGO13  SFE_LOGO_NAME.1_INCH  [SFE_LOGO_NAME_.1]  120.4,63.88 90 top
LOGO14  OSHW-LOGOS  [OSHW-LOGO-S]  86.36,106.43 0 top
LOGO15  SFE_LOGO_NAME_FLAME.1_INCH  [SFE_LOGO_NAME_FLAME_.1]  81.03,92.33 90 bottom
LOGO16  SFE_LOGO_FLAME.1_INCH  [SFE_LOGO_FLAME_.1]  123.19,105.16 0 top
LOGO17  SFE_LOGO_NAME.1_INCH  [SFE_LOGO_NAME_.1]  183.9,12.57 90 top
LOGO18  OSHW-LOGOS  [OSHW-LOGO-S]  149.86,55.12 0 top
LOGO19  SFE_LOGO_NAME_FLAME.1_INCH  [SFE_LOGO_NAME_FLAME_.1]  144.53,41.02 90 bottom
LOGO20  SFE_LOGO_FLAME.1_INCH  [SFE_LOGO_FLAME_.1]  186.69,53.85 0 top
LOGO21  SFE_LOGO_NAME.1_INCH  [SFE_LOGO_NAME_.1]  183.9,63.88 90 top
LOGO22  OSHW-LOGOS  [OSHW-LOGO-S]  149.86,106.43 0 top
LOGO23  SFE_LOGO_NAME_FLAME.1_INCH  [SFE_LOGO_NAME_FLAME_.1]  144.53,92.33 90 bottom
LOGO24  SFE_LOGO_FLAME.1_INCH  [SFE_LOGO_FLAME_.1]  186.69,105.16 0 top
LOGO25  SFE_LOGO_NAME.1_INCH  [SFE_LOGO_NAME_.1]  247.4,12.57 90 top
LOGO26  OSHW-LOGOS  [OSHW-LOGO-S]  213.36,55.12 0 top
LOGO27  SFE_LOGO_NAME_FLAME.1_INCH  [SFE_LOGO_NAME_FLAME_.1]  208.03,41.02 90 bottom
LOGO28  SFE_LOGO_FLAME.1_INCH  [SFE_LOGO_FLAME_.1]  250.19,53.85 0 top
LOGO29  SFE_LOGO_NAME.1_INCH  [SFE_LOGO_NAME_.1]  247.4,63.88 90 top
LOGO30  OSHW-LOGOS  [OSHW-LOGO-S]  213.36,106.43 0 top
LOGO31  SFE_LOGO_NAME_FLAME.1_INCH  [SFE_LOGO_NAME_FLAME_.1]  208.03,92.33 90 bottom
LOGO32  SFE_LOGO_FLAME.1_INCH  [SFE_LOGO_FLAME_.1]  250.19,105.16 0 top
LOGO33  SFE_LOGO_NAME.1_INCH  [SFE_LOGO_NAME_.1]  310.9,12.57 90 top
LOGO34  OSHW-LOGOS  [OSHW-LOGO-S]  276.86,55.12 0 top
LOGO35  SFE_LOGO_NAME_FLAME.1_INCH  [SFE_LOGO_NAME_FLAME_.1]  271.53,41.02 90 bottom
LOGO36  SFE_LOGO_FLAME.1_INCH  [SFE_LOGO_FLAME_.1]  313.69,53.85 0 top
LOGO37  SFE_LOGO_NAME.1_INCH  [SFE_LOGO_NAME_.1]  310.9,63.88 90 top
LOGO38  OSHW-LOGOS  [OSHW-LOGO-S]  276.86,106.43 0 top
LOGO39  SFE_LOGO_NAME_FLAME.1_INCH  [SFE_LOGO_NAME_FLAME_.1]  271.53,92.33 90 bottom
LOGO40  SFE_LOGO_FLAME.1_INCH  [SFE_LOGO_FLAME_.1]  313.69,105.16 0 top
R1  100k  [0603]  62.23,28.19 270 top
R2  10k  [0603]  24.89,36.7 0 top
R3  1k  [0603]  24.13,34.8 0 top
R4  100k  [0603]  62.23,51.31 180 top
R5  4.7k  [0603]  57.15,103.25 0 top
R6  100k  [0603]  60.71,28.19 270 top
R7  100k  [0603]  65.41,17.02 270 top
R8  10k  [0603]  66.29,28.45 90 top
R9  1k  [0603]  24.13,27.81 0 top
R10  10k  [0603]  64.77,28.45 270 top
R11  4.7k  [0603]  57.15,96.77 0 top
R12  DNP  [AXIAL-0.1]  68.58,32.26 270 top
R13  4.7k  [0603]  57.15,51.94 0 top
R14  4.7k  [0603]  57.15,45.47 0 top
R15  100k  [0603]  65.41,68.33 270 top
R16  100k  [0603]  62.23,102.62 180 top
R17  100k  [0603]  62.23,79.5 270 top
R18  100k  [0603]  60.71,79.5 270 top
R19  1k  [0603]  24.13,79.12 0 top
R20  10k  [0603]  24.89,88.01 0 top
R21  1k  [0603]  24.13,86.11 0 top
R22  10k  [0603]  64.77,79.76 270 top
R23  10k  [0603]  66.29,79.76 90 top
R24  DNP  [AXIAL-0.1]  68.58,83.57 270 top
R25  4.7k  [0603]  120.65,51.94 0 top
R26  4.7k  [0603]  120.65,45.47 0 top
R27  100k  [0603]  128.91,17.02 270 top
R28  100k  [0603]  125.73,51.31 180 top
R29  100k  [0603]  125.73,28.19 270 top
R30  100k  [0603]  124.21,28.19 270 top
R31  1k  [0603]  87.63,27.81 0 top
R32  10k  [0603]  88.39,36.7 0 top
R33  1k  [0603]  87.63,34.8 0 top
R34  10k  [0603]  128.27,28.45 270 top
R35  10k  [0603]  129.79,28.45 90 top
R36  DNP  [AXIAL-0.1]  132.08,32.26 270 top
R37  4.7k  [0603]  120.65,103.25 0 top
R38  4.7k  [0603]  120.65,96.77 0 top
R39  100k  [0603]  128.91,68.33 270 top
R40  100k  [0603]  125.73,102.62 180 top
R41  100k  [0603]  125.73,79.5 270 top
R42  100k  [0603]  124.21,79.5 270 top
R43  1k  [0603]  87.63,79.12 0 top
R44  10k  [0603]  88.39,88.01 0 top
R45  1k  [0603]  87.63,86.11 0 top
R46  10k  [0603]  128.27,79.76 270 top
R47  10k  [0603]  129.79,79.76 90 top
R48  DNP  [AXIAL-0.1]  132.08,83.57 270 top
R49  4.7k  [0603]  184.15,51.94 0 top
R50  4.7k  [0603]  184.15,45.47 0 top
R51  100k  [0603]  192.41,17.02 270 top
R52  100k  [0603]  189.23,51.31 180 top
R53  100k  [0603]  189.23,28.19 270 top
R54  100k  [0603]  187.71,28.19 270 top
R55  1k  [0603]  151.13,27.81 0 top
R56  10k  [0603]  151.89,36.7 0 top
R57  1k  [0603]  151.13,34.8 0 top
R58  10k  [0603]  191.77,28.45 270 top
R59  10k  [0603]  193.29,28.45 90 top
R60  DNP  [AXIAL-0.1]  195.58,32.26 270 top
R61  4.7k  [0603]  184.15,103.25 0 top
R62  4.7k  [0603]  184.15,96.77 0 top
R63  100k  [0603]  192.41,68.33 270 top
R64  100k  [0603]  189.23,102.62 180 top
R65  100k  [0603]  189.23,79.5 270 top
R66  100k  [0603]  187.71,79.5 270 top
R67  1k  [0603]  151.13,79.12 0 top
R68  10k  [0603]  151.89,88.01 0 top
R69  1k  [0603]  151.13,86.11 0 top
R70  10k  [0603]  191.77,79.76 270 top
R71  10k  [0603]  193.29,79.76 90 top
R72  DNP  [AXIAL-0.1]  195.58,83.57 270 top
R73  4.7k  [0603]  247.65,51.94 0 top
R74  4.7k  [0603]  247.65,45.47 0 top
R75  100k  [0603]  255.91,17.02 270 top
R76  100k  [0603]  252.73,51.31 180 top
R77  100k  [0603]  252.73,28.19 270 top
R78  100k  [0603]  251.21,28.19 270 top
R79  1k  [0603]  214.63,27.81 0 top
R80  10k  [0603]  215.39,36.7 0 top
R81  1k  [0603]  214.63,34.8 0 top
R82  10k  [0603]  255.27,28.45 270 top
R83  10k  [0603]  256.79,28.45 90 top
R84  DNP  [AXIAL-0.1]  259.08,32.26 270 top
R85  4.7k  [0603]  247.65,103.25 0 top
R86  4.7k  [0603]  247.65,96.77 0 top
R87  100k  [0603]  255.91,68.33 270 top
R88  100k  [0603]  252.73,102.62 180 top
R89  100k  [0603]  252.73,79.5 270 top
R90  100k  [0603]  251.21,79.5 270 top
R91  1k  [0603]  214.63,79.12 0 top
R92  10k  [0603]  215.39,88.01 0 top
R93  1k  [0603]  214.63,86.11 0 top
R94  10k  [0603]  255.27,79.76 270 top
R95  10k  [0603]  256.79,79.76 90 top
R96  DNP  [AXIAL-0.1]  259.08,83.57 270 top
R97  4.7k  [0603]  311.15,51.94 0 top
R98  4.7k  [0603]  311.15,45.47 0 top
R99  100k  [0603]  319.4,17.02 270 top
R100  100k  [0603]  316.23,51.31 180 top
R101  100k  [0603]  316.23,28.19 270 top
R102  100k  [0603]  314.71,28.19 270 top
R103  1k  [0603]  278.13,27.81 0 top
R104  10k  [0603]  278.89,36.7 0 top
R105  1k  [0603]  278.13,34.8 0 top
R106  10k  [0603]  318.77,28.45 270 top
R107  10k  [0603]  320.29,28.45 90 top
R108  DNP  [AXIAL-0.1]  322.58,32.26 270 top
R109  4.7k  [0603]  311.15,103.25 0 top
R110  4.7k  [0603]  311.15,96.77 0 top
R111  100k  [0603]  319.4,68.33 270 top
R112  100k  [0603]  316.23,102.62 180 top
R113  100k  [0603]  316.23,79.5 270 top
R114  100k  [0603]  314.71,79.5 270 top
R115  1k  [0603]  278.13,79.12 0 top
R116  10k  [0603]  278.89,88.01 0 top
R117  1k  [0603]  278.13,86.11 0 top
R118  10k  [0603]  318.77,79.76 270 top
R119  10k  [0603]  320.29,79.76 90 top
R120  DNP  [AXIAL-0.1]  322.58,83.57 270 top
U1  BME280  [LGA-8-2.5X2.5]  62.23,48.77 90 top
U2  CCS811  [LGA10-2.7X4.0MM]  62.23,32.26 90 top
U3  APDS-9301  [CHIPLED-6]  62.1,18.29 270 top
U4  TVS Diode  [SOT-23-6]  24.13,32.26 270 top
U5  CCS811  [LGA10-2.7X4.0MM]  62.23,83.57 90 top
U6  BME280  [LGA-8-2.5X2.5]  62.23,100.08 90 top
U7  TVS Diode  [SOT-23-6]  24.13,83.57 270 top
U8  APDS-9301  [CHIPLED-6]  62.1,69.6 270 top
U9  CCS811  [LGA10-2.7X4.0MM]  125.73,32.26 90 top
U10  BME280  [LGA-8-2.5X2.5]  125.73,48.77 90 top
U11  TVS Diode  [SOT-23-6]  87.63,32.26 270 top
U12  APDS-9301  [CHIPLED-6]  125.6,18.29 270 top
U13  CCS811  [LGA10-2.7X4.0MM]  125.73,83.57 90 top
U14  BME280  [LGA-8-2.5X2.5]  125.73,100.08 90 top
U15  TVS Diode  [SOT-23-6]  87.63,83.57 270 top
U16  APDS-9301  [CHIPLED-6]  125.6,69.6 270 top
U17  CCS811  [LGA10-2.7X4.0MM]  189.23,32.26 90 top
U18  BME280  [LGA-8-2.5X2.5]  189.23,48.77 90 top
U19  TVS Diode  [SOT-23-6]  151.13,32.26 270 top
U20  APDS-9301  [CHIPLED-6]  189.1,18.29 270 top
U21  CCS811  [LGA10-2.7X4.0MM]  189.23,83.57 90 top
U22  BME280  [LGA-8-2.5X2.5]  189.23,100.08 90 top
U23  TVS Diode  [SOT-23-6]  151.13,83.57 270 top
U24  APDS-9301  [CHIPLED-6]  189.1,69.6 270 top
U25  CCS811  [LGA10-2.7X4.0MM]  252.73,32.26 90 top
U26  BME280  [LGA-8-2.5X2.5]  252.73,48.77 90 top
U27  TVS Diode  [SOT-23-6]  214.63,32.26 270 top
U28  APDS-9301  [CHIPLED-6]  252.6,18.29 270 top
U29  CCS811  [LGA10-2.7X4.0MM]  252.73,83.57 90 top
U30  BME280  [LGA-8-2.5X2.5]  252.73,100.08 90 top
U31  TVS Diode  [SOT-23-6]  214.63,83.57 270 top
U32  APDS-9301  [CHIPLED-6]  252.6,69.6 270 top
U33  CCS811  [LGA10-2.7X4.0MM]  316.23,32.26 90 top
U34  BME280  [LGA-8-2.5X2.5]  316.23,48.77 90 top
U35  TVS Diode  [SOT-23-6]  278.13,32.26 270 top
U36  APDS-9301  [CHIPLED-6]  316.1,18.29 270 top
U37  CCS811  [LGA10-2.7X4.0MM]  316.23,83.57 90 top
U38  BME280  [LGA-8-2.5X2.5]  316.23,100.08 90 top
U39  TVS Diode  [SOT-23-6]  278.13,83.57 270 top
U40  APDS-9301  [CHIPLED-6]  316.1,69.6 270 top

## Library data of the parts
B1-B10 = SparkFun-Boards
C1 C4 C6-C9 C13-C15 C19-C21 C25-C27 C31-C33 C37-C39 C43-C45 C49-C51 C55-C57 = SparkFun-Capacitors; PROD_ID: CAP-00810
C2 C3 C5 C10-C12 C16-C18 C22-C24 C28-C30 C34-C36 C40-C42 C46-C48 C52-C54 C58-C60 = SparkFun-Capacitors; PROD_ID: CAP-00868
E$1 = SparkFun-Retired
E$7 E$8 FD1-FD40 LOGO1-LOGO40 = SparkFun-Aesthetics
H1-H40 = SparkFun-Hardware
J1 J15 J27 J39 J51 J63 J75 J87 J99 J111 = esp32-environ-monitor-temp; PROD_ID: CONN-08590; SF_ID: PRT-00132
J2 J14 J26 J38 J50 J62 J74 J86 J98 J110 = esp32-environ-monitor-temp; PROD_ID: CONN-08590; SF_ID: SEN-08942
J3-J13 J16-J25 J28-J37 J40-J49 J52-J61 J64-J73 J76-J85 J88-J97 J100-J109 J112-J120 = SparkFun-Connectors
JP1-JP50 = SparkFun-Jumpers
R1 R4 R6 R7 R15-R18 R27-R30 R39-R42 R51-R54 R63-R66 R75-R78 R87-R90 R99-R102 R111-R114 = SparkFun-Resistors; PROD_ID: RES-07828
R2 R10 R20 R22 R32 R34 R44 R46 R56 R58 R68 R70 R80 R82 R92 R94 R104 R106 R116 R118 = SparkFun-Resistors; PROD_ID: RES-00824
R3 R9 R19 R21 R31 R33 R43 R45 R55 R57 R67 R69 R79 R81 R91 R93 R103 R105 R115 R117 = SparkFun-Resistors; PROD_ID: RES-07856
R5 R11 R13 R14 R25 R26 R37 R38 R49 R50 R61 R62 R73 R74 R85 R86 R97 R98 R109 R110 = SparkFun-Resistors; PROD_ID: RES-07857
R8 R23 R35 R47 R59 R71 R83 R95 R107 R119 = esp32-environ-monitor-temp; PROD_ID: RES-13608
R12 R24 R36 R48 R60 R72 R84 R96 R108 R120 = esp32-environ-monitor-temp; SF_ID: SEN-00250
U1 U6 U10 U14 U18 U22 U26 U30 U34 U38 = SparkFun-Sensors; PROD_ID: IC-13090
U2 U5 U9 U13 U17 U21 U25 U29 U33 U37 = esp32-environ-monitor-temp; PROD_ID: IC-13607
U3 U8 U12 U16 U20 U24 U28 U32 U36 U40 = SparkFun-Sensors; PROD_ID: IC-13662
U4 U7 U11 U15 U19 U23 U27 U31 U35 U39 = esp32-environ-monitor-temp; PROD_ID: IC-13538